# EAGLE board Laser Tag Dip (EAGLE 6.0)
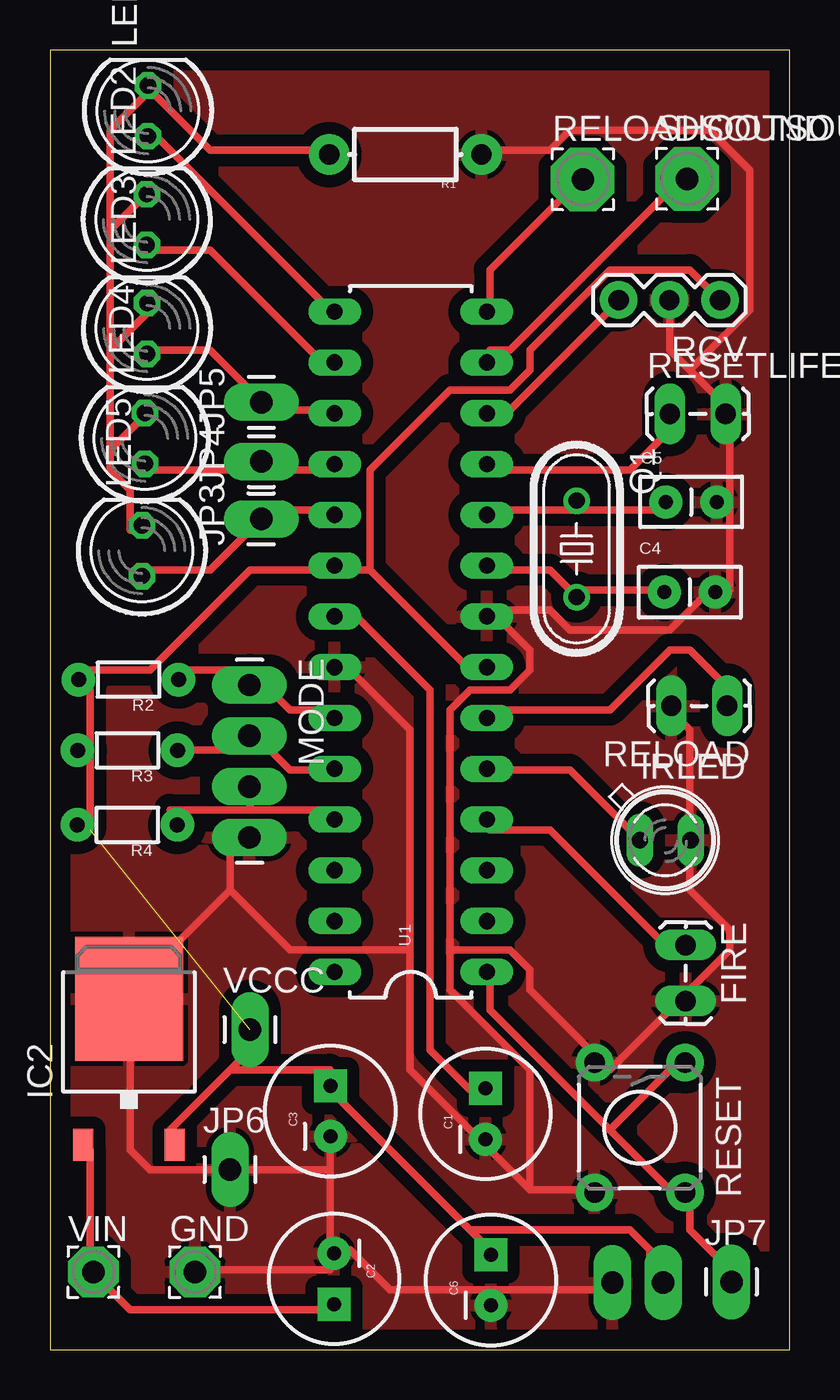
[diagram p0: board, top side]

Size 37 x 65 mm. Coordinates in mm from the lower left corner, seen from the top.
Outline: 0,0 37,0 37,65 0,65 0,0
Copper layers (1*16): Top 0.035mm / dielectric 1.5mm / Bottom 0.035mm
Design rules: minimum track width 10mil, minimum drill 24mil, track to track 8mil, track to pad 8mil, pad to pad 8mil, via to via 8mil, smd to smd 8mil, copper to edge 40mil, drill to drill 8mil, minimum pad ring 10mil, minimum via ring 8mil, stop-mask expansion 4mil, vias tented up to drill 0mil, thermal gap 10mil
Net classes: 0 default: width 0.381 mm, drill 0.203 mm, clearance 0.254 mm

## Footprints (pad centres in the part's own frame; a part is rotated, then mirrored left to right if it is on the bottom)
CPOL-RADIAL-100UF-25V = drill 0.7 pad 1.651 square: 1 1.27,0 | drill 0.7 pad 1.651: 2 -1.27,0
CAP-PTH-SMALLEZ = drill 0.7 pad 1.651: 1 0,0; 2 2.54,0
1X02_LOCK_LONGPADS = drill 1.016 long: 1 -0.127,0; 2 2.667,0
2,54/1,1 = drill 1.118 pad 2.54 octagon: 1 0,0
TO252 = smd 1 x 1.6: 1 -2.28,-4.8; 2 2.28,-4.8 | smd 5.4 x 6.2: 3 0,2.5
SFH482 = drill 0.813 long: A -1.27,0; K 1.27,0
1X01_LONGPAD = drill 1.118 pad 1.88 long: 1 0,0
LED5MM = drill 0.813 octagon: A -1.27,0; K 1.27,0
1X04_LONGPADS = drill 1.118 pad 1.88 long: 1 0,0; 2 2.54,0; 3 5.08,0; 4 7.62,0
HC49/S = drill 0.813: 1 -2.413,0; 2 2.413,0
AXIAL-0.3-KIT = drill 1.016 pad 2.032: P$1 -3.81,0; P$2 3.81,0
1/6W-RES = drill 0.762 pad 1.676: 1 -2.5,0; 2 2.5,0
1X03 = drill 1.016 pad 1.88: 1 0,0; 2 2.54,0; 3 5.08,0
3,17/1,1 = drill 1.118 pad 3.175 octagon: 1 0,0
TACTILE-PTH = drill 1.016 pad 1.88: 1 -3.251,2.261; 2 3.251,2.261; 3 -3.251,-2.261; 4 3.251,-2.261
DIL28-3 = drill 0.813 long: 1 -16.51,-3.81; 2 -13.97,-3.81; 3 -11.43,-3.81; 4 -8.89,-3.81; 5 -6.35,-3.81; 6 -3.81,-3.81; 7 -1.27,-3.81; 8 1.27,-3.81; 9 3.81,-3.81; 10 6.35,-3.81; 11 8.89,-3.81; 12 11.43,-3.81; 13 13.97,-3.81; 14 16.51,-3.81; 15 16.51,3.81; 16 13.97,3.81; 17 11.43,3.81; 18 8.89,3.81; 19 6.35,3.81; 20 3.81,3.81; 21 1.27,3.81; 22 -1.27,3.81; 23 -3.81,3.81; 24 -6.35,3.81; 25 -8.89,3.81; 26 -11.43,3.81; 27 -13.97,3.81; 28 -16.51,3.81
1X02_LONGPADS = drill 1.118 pad 1.88 long: 1 0,0; 2 2.54,0

## Placement (x,y rotation side)
C1  [CPOL-RADIAL-100UF-25V]  21.79,11.79 90 top
C2  [CPOL-RADIAL-100UF-25V]  14.21,3.54 270 top
C3  [CPOL-RADIAL-100UF-25V]  14.03,11.93 90 top
C4  [CAP-PTH-SMALLEZ]  30.74,37.88 0 top
C5  [CAP-PTH-SMALLEZ]  30.81,42.4 0 top
C6  [CPOL-RADIAL-100UF-25V]  22.07,3.48 90 top
FIRE  [1X02_LOCK_LONGPADS]  31.8,20.1 270 top
GND  GND PAD  [2,54/1,1]  7.25,3.88 0 top
IC2  7805DT  [TO252]  3.95,15.05 0 top
IRLED  SFH482  [SFH482]  30.78,25.48 0 top
JP3  13  [1X01_LONGPAD]  10.57,41.55 90 top
JP4  12  [1X01_LONGPAD]  10.57,44.42 90 top
JP5  11  [1X01_LONGPAD]  10.57,47.38 90 top
JP6  M01PTH_LONGPAD  [1X01_LONGPAD]  9,9 0 top
JP7  M01PTH_LONGPAD  [1X01_LONGPAD]  34.09,3.38 0 top
LED1  [LED5MM]  4.9,61.96 90 top
LED2  [LED5MM]  4.84,56.52 90 top
LED3  [LED5MM]  4.86,51.07 90 top
LED4  [LED5MM]  4.75,45.58 90 top
LED5  [LED5MM]  4.6,39.95 90 top
MODE  [1X04_LONGPADS]  9.98,33.23 270 top
Q1  [HC49/S]  26.35,40.05 270 top
R1  [AXIAL-0.3-KIT]  17.78,59.77 180 top
R2  [1/6W-RES]  3.93,33.51 180 top
R3  [1/6W-RES]  3.88,29.97 180 top
R4  [1/6W-RES]  3.87,26.24 180 top
RCV  IR RCVR  [1X03]  33.53,52.49 180 top
RELOAD  [1X02_LOCK_LONGPADS]  33.75,32.2 180 top
RELOADSOUND  RELOAD  [3,17/1,1]  26.66,58.53 0 top
RESET  [TACTILE-PTH]  29.51,11.1 270 top
RESETLIFE  [1X02_LOCK_LONGPADS]  31.14,46.8 0 top
SHOOTSOUND  SHOOT  [3,17/1,1]  31.87,58.56 0 top
U1  ATMEGA328P_PDIP  [DIL28-3]  18.05,35.4 90 top
VCCC  5  [1X01_LONGPAD]  10,16 0 top
VIN  Vin PAD  [2,54/1,1]  2.17,3.88 0 top
VOUT  [1X02_LONGPADS]  30.68,3.34 180 top

## Library data of the parts
C1-C6 = SparkFun-Capacitors
FIRE JP3-JP7 MODE RCV RELOAD RESETLIFE VCCC VOUT = SparkFun-Connectors
GND RELOADSOUND SHOOTSOUND VIN = wirepad
IC2 = linear
IRLED LED1-LED5 = led
Q1 = crystal; OC_FARNELL: 1667008; OC_NEWARK: unknown
R1-R4 = SparkFun-Resistors
RESET = SparkFun-Electromechanical
U1 = SparkFun-DigitalIC

## Nets
CONNECT: FIRE.1 U1.4
GND: C1.2 C2.2 C3.2 C4.2 C5.2 C6.2 FIRE.2 GND.1 IC2.3 IRLED.K JP6.1 MODE.4 R1.P$1 RCV.2 RELOAD.2 RESET.3 RESET.4 RESETLIFE.2 U1.8 U1.22 VOUT.2
N$1: C2.1 IC2.1 VIN.1
N$2: C1.1 U1.21
N$3: LED1.A U1.15
N$4: C5.1 Q1.1 U1.10
N$5: LED2.A U1.16
N$6: C4.1 Q1.2 U1.9
N$7: JP5.1 LED3.A U1.17
N$8: JP4.1 LED4.A U1.18
N$9: JP3.1 LED5.A U1.19
N$10: LED1.K LED2.K LED3.K LED4.K LED5.K R1.P$2
N$11: IRLED.A U1.5
N$13: RELOAD.1 U1.6
N$14: RESETLIFE.1 U1.11
N$15: RCV.3 U1.12
N$17: MODE.1 R2.1 U1.23
N$18: MODE.2 R3.1 U1.24
N$19: MODE.3 R4.1 U1.25
RELOADSOUND: RELOADSOUND.1 U1.14
RESETWIRE: JP7.1 RESET.1 RESET.2 U1.1
SHOOTSOUND: SHOOTSOUND.1 U1.13
VCC: C3.1 C6.1 IC2.2 R2.2 R3.2 R4.2 RCV.1 U1.7 U1.20 VCCC.1 VOUT.1

## Tracks (layer width: path | path; a pad name or v marks a point on that pad's centre or on a via)
CONNECT
  Top 0.381: U1.4 22,26 25,26 31,20 FIRE.1
GND
  Top 0.381: 22,37 25,37 26,36 31,36 33,38 C4.2 34,38 34,42 | 34,42 34,46 RESETLIFE.2 34,47 32,49 | 32,49 31,50 31,52 RCV.2 | 32,49 35,52 35,59 33,61 26,61 25,60 22,60 R1.P$1 | 34,42 C5.2 | 22,3 28,3 VOUT.2 | 14,9 14,10 C3.2 | 14,9 14,5 C2.2 | 14,9 JP6.1 5,9 4,10 4,17 IC2.3 4,18 9,23 | GND.1 8,4 14,4 C2.2 | 22,3 17,3 15,5 C2.2 | 22,3 C6.2 | RELOAD.2 31,32 32,31 32,26 IRLED.K 32,25 32,23 34,21 34,20 32,18 FIRE.2 31,17 28,14 RESET.3 27,15 24,18 24,19 23,20 20,20 | 9,23 9,25 MODE.4 | 18,20 18,14 22,10 | 18,20 18,31 15,34 U1.22 | 24,8 27,8 RESET.4 | 22,10 24,8 | 22,10 C1.2 | 9,23 12,20 18,20 | 20,20 20,18 24,14 24,8 | 22,37 24,35 24,34 23,33 21,33 20,32 20,20 | 22,37 U1.8
  pour Top (isolate 0.61): 0,65 37,65 37,0 0,0
N$1
  Top 0.381: IC2.1 2,10 2,4 VIN.1 3,3 4,2 14,2 C2.1
N$2
  Top 0.381: U1.21 15,37 19,33 19,15 21,13 C1.1
N$3
  Top 0.381: LED1.A 5,61 14,52 U1.15
N$4
  Top 0.381: 26,42 22,42 U1.10 | 26,42 31,42 C5.1 | 26,42 Q1.1
N$5
  Top 0.381: LED2.A 5,55 8,55 14,49 U1.16
N$6
  Top 0.381: 26,38 25,39 22,39 U1.9 | 26,38 30,38 C4.1 | 26,38 Q1.2
N$7
  Top 0.381: LED3.A 5,50 8,50 10,48 JP5.1 11,47 14,47 U1.17
N$8
  Top 0.381: LED4.A 5,44 10,44 JP4.1 11,44 14,44 U1.18
N$9
  Top 0.381: LED5.A 5,39 8,39 10,41 JP3.1 11,42 14,42 U1.19
N$10
  Top 0.381: 3,45 3,44 4,43 4,41 LED5.K | 3,45 5,47 LED4.K | 3,50 5,52 LED3.K | 3,45 3,50 | 3,56 5,58 LED2.K | 3,50 3,56 | 5,63 3,61 3,56 | 5,63 8,60 13,60 R1.P$2 | 5,63 LED1.K
N$11
  Top 0.381: U1.5 22,29 26,29 29,26 IRLED.A
N$13
  Top 0.381: U1.6 22,32 28,32 31,35 32,35 34,33 RELOAD.1
N$14
  Top 0.381: U1.11 22,44 29,44 31,46 RESETLIFE.1
N$15
  Top 0.381: U1.12 22,47 23,47 28,52 RCV.3
N$17
  Top 0.381: U1.23 14,32 12,32 10,34 MODE.1 9,34 7,34 R2.1
N$18
  Top 0.381: U1.24 14,29 12,29 10,31 MODE.2 9,30 7,30 R3.1
N$19
  Top 0.381: 10,27 6,27 R4.1 | 10,27 14,27 U1.25 | 10,27 10,28 MODE.3
RELOADSOUND
  Top 0.381: U1.14 22,52 22,54 26,58 RELOADSOUND.1
RESETWIRE
  Top 0.381: 28,11 31,8 RESET.2 32,7 32,6 34,4 JP7.1 | 28,11 22,17 22,19 U1.1 | 28,11 31,14 RESET.1
SHOOTSOUND
  Top 0.381: U1.13 22,50 23,50 31,58 SHOOTSOUND.1
VCC  (1 unrouted)
  Top 0.381: 2,30 2,26 R4.2 | 2,30 2,33 R2.2 2,34 5,34 10,39 14,39 U1.20 15,39 16,39 | 2,30 R3.2 | 16,39 21,34 U1.7 | 16,39 16,44 20,48 23,48 24,49 24,50 28,54 32,54 33,53 RCV.1 | 9,14 10,15 VCCC.1 | 9,14 6,11 IC2.2 | 9,14 14,14 C3.1 14,13 21,6 | 21,6 22,5 C6.1 | 21,6 29,6 30,5 30,4 VOUT.1